# Altium PCB FM375_LQFP64_SOCKET.PcbDoc (part 1 of 3)
Units mil, origin at the board's own origin, x right, y up, seen from the top; angles counter-clockwise.
Board outline 6000 x 4000 mil, 2 copper layers (Top Layer, Bottom Layer); 12 components, 66 nets, 201 pads, 0 vias.
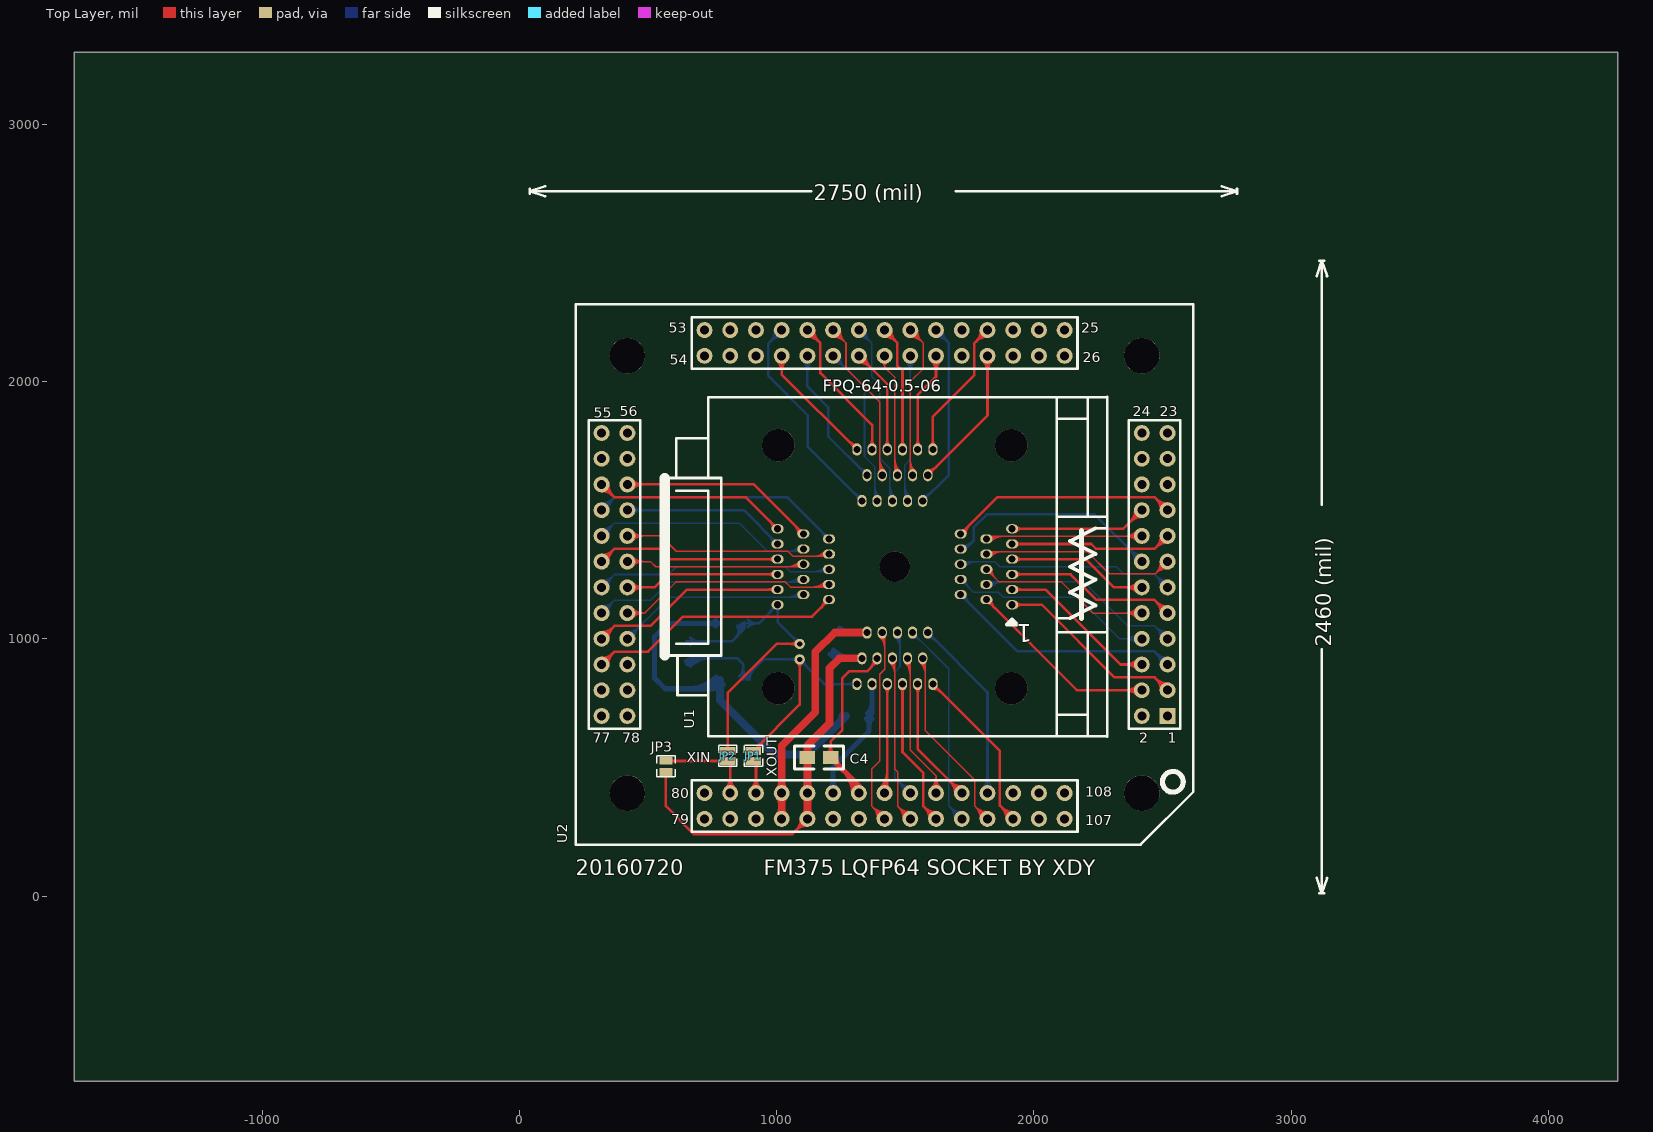
[diagram p0: Top Layer view]
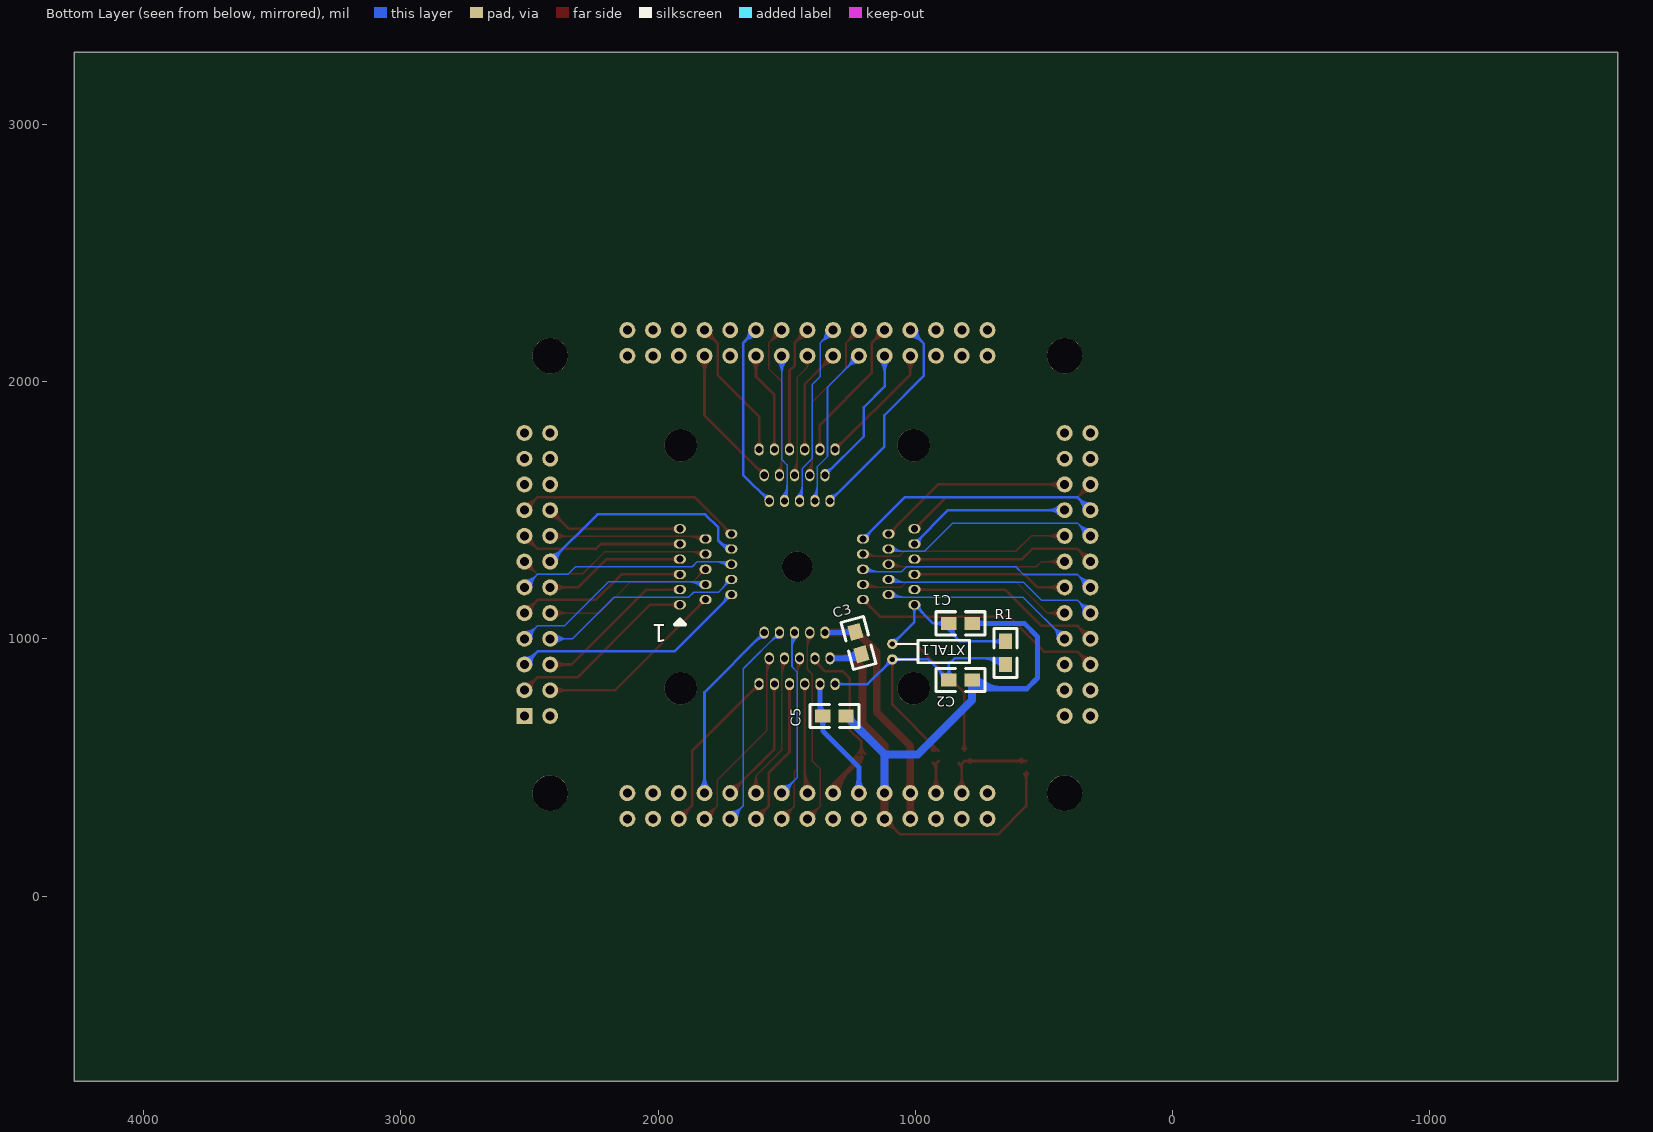
[diagram p1: Bottom Layer view, seen from below]

## Layer stack, top to bottom
Top Layer: signal copper 1.4
Dielectric: dielectric 12.6, FR-4, Dk 4.8
Bottom Layer: signal copper 1.4

## Board outline
-1730,-720 4270,-720 4270,3280 -1730,3280

## Design rules (kind name [scope] priority, off if disabled: settings)
Clearance [All] p1: gap=5
HoleSize [All] p1: absolutevalues=TRUE maxlimit=500 minlimit=1 maxpercent=80.000 minpercent=20.000
HoleToHoleClearance [All] p1: gap=5 allowstackedmicrovias=TRUE
MinimumSolderMaskSliver [All] p1: minsoldermaskwidth=0
PolygonConnect [All] p1: connectstyle=Relief reliefconductorwidth=10 reliefentries=4 polygonreliefangle="90 Angle"
RoutingVias [All] p1: holewidth=28 width=50 viastyle="Through Hole" minholewidth=28 minwidth=50 maxholewidth=28 maxwidth=50
SilkToSilkClearance [All] p1: silktosilkclearance=0
SilkscreenOverComponentPads [All] p1: minsilkscreentomaskgap=0
SolderMaskExpansion [All] p1: expansion=4
TestPointUsage [All] p1: valid=0 allowmultiple=FALSE
Testpoint [All] p1: side=15 testpointundercomponent=TRUE minsize=40 maxsize=100 preferedsize=60 minholesize=0 maxholesize=40 preferedholesize=32 testpointgrid=1 style=1023 order=0123456789
Width [All] p1: maxlimit=100 minlimit=5 preferedwidth=10
19 further rules are at their usual default settings.

## Components (designator, comment, footprint, x,y, rotation, side; value= is the part's Value field where it differs from the comment)
C1 "Cap" 0805 870,1060 r180 bottom
C2 "Cap" 0805 870,840 r180 bottom
C3 "100nF" 0805 1210,940 r75 bottom
C4 "3.3nF" 0805 1120,539 r0 top
C5 "100nF" 0805 1270,700 r0 bottom
JP1 "XOUT" 0603_SHORT#1 910,580 r270 top
JP2 "XIN" 0603_SHORT#1 810,580 r270 top
JP3 "XIN" 0603_SHORT#2 570,540 r270 top
R1 "10M" 0805 650,900 r90 bottom
U1 "FM375" QFP64_10*10_JJ 1460,1280 r180 top
U2 "FM375_SOCKET108" SOCKET108_LARGE 2520,700 r180 top
XTAL1 "32K" XTAL-RB32K_2 1090,980 r270 bottom

## Footprints (in the part's own frame and the unit in brackets; to place one, negate y for a bottom-side part, rotate by r counter-clockwise, add the part's x,y. Pads: shape width x height; smd on the part's side, far side on the other; paste and mask are expansions set on the pad)
0603_SHORT#1 [mm]
  rect 0.8x1.524 smd: 1(0.4,0) 2(1.4,0)
  silkscreen extent -0.14,-0.9 1.94,0.9
0603_SHORT#2 [mm]
  rect 0.8x1.27 smd: 1(0.35,-0.01) 2(1.46,0)
  silkscreen extent -0.14,-0.9 1.94,0.9
0805 [mil]
  rect 60x50 smd: 1(0,0) 2(90,0)
  silkscreen extent -50,-45 140,45
QFP64_10*10_JJ [mm]
  round 3.2 hole 3.2: 0(-11.5,12) 0(-11.5,-12) 0(11.5,12) 0(11.5,-12)
  round 3 hole 3: 0(0,0)
  oval 1.2x0.9 hole 0.7: 1(-11.58,3.75) 2(-9.04,3.25) 3(-6.5,2.75) 4(-11.58,2.25) 5(-9.04,1.75) 6(-6.5,1.25) 7(-11.58,0.75) 8(-9.04,0.25) 9(-6.5,-0.25) 10(-11.58,-0.75) 11(-9.04,-1.25) 12(-6.5,-1.75) 13(-11.58,-2.25) 14(-9.04,-2.75) 15(-6.5,-3.25) 16(-11.58,-3.75) 33(11.58,-3.75) 34(9.04,-3.25) 35(6.5,-2.75) 36(11.58,-2.25) 37(9.04,-1.75) 38(6.5,-1.25) 39(11.58,-0.75) 40(9.04,-0.25) 41(6.5,0.25) 42(11.58,0.75) 43(9.04,1.25) 44(6.5,1.75) 45(11.58,2.25) 46(9.04,2.75) 47(6.5,3.25) 48(11.58,3.75)
  oval 0.9x1.2 hole 0.7: 17(-3.75,-11.58) 18(-3.25,-9.04) 19(-2.75,-6.5) 20(-2.25,-11.58) 21(-1.75,-9.04) 22(-1.25,-6.5) 23(-0.75,-11.58) 24(-0.25,-9.04) 25(0.25,-6.5) 26(0.75,-11.58) 27(1.25,-9.04) 28(1.75,-6.5) 29(2.25,-11.58) 30(2.75,-9.04) 31(3.25,-6.5) 32(3.75,-11.58) 49(3.75,11.58) 50(3.25,9.04) 51(2.75,6.5) 52(2.25,11.58) 53(1.75,9.04) 54(1.25,6.5) 55(0.75,11.58) 56(0.25,9.04) 57(-0.25,6.5) 58(-0.75,11.58) 59(-1.25,9.04) 60(-1.75,6.5) 61(-2.25,11.58) 62(-2.75,9.04) 63(-3.25,6.5) 64(-3.75,11.58)
  silkscreen extent -20.96,-16.76 22.73,16.76
SOCKET108_LARGE [mil]
  round 137.8 hole 137.8: 0(100,300) 0(100,-1400) 0(2100,-1400) 0(2100,300)
  rect 62x62 hole 35: 1(0,0)
  round 62 hole 35: 2(100,0) 3(0,-100) 4(100,-100) 5(0,-200) 6(100,-200) 7(0,-300) 8(100,-300) 9(0,-400) 10(100,-400) 11(0,-500) 12(100,-500) 13(0,-600) 14(100,-600) 15(0,-700) 16(100,-700) 17(0,-800) 18(100,-800) 19(0,-900) 20(100,-900) 21(0,-1000) 22(100,-1000) 23(0,-1100) 24(100,-1100) 25(400,-1500) 26(400,-1400) 27(500,-1500) 28(500,-1400) 29(600,-1500) 30(600,-1400) 31(700,-1500) 32(700,-1400) 33(800,-1500) 34(800,-1400) 35(900,-1500) 36(900,-1400) 37(1000,-1500) 38(1000,-1400) 39(1100,-1500) 40(1100,-1400) 41(1200,-1500) 42(1200,-1400) 43(1300,-1500) 44(1300,-1400) 45(1400,-1500) 46(1400,-1400) 47(1500,-1500) 48(1500,-1400) 49(1600,-1500) 50(1600,-1400) 51(1700,-1500) 52(1700,-1400) 53(1800,-1500) 54(1800,-1400) 55(2200,-1100) 56(2100,-1100) 57(2200,-1000) 58(2100,-1000) 59(2200,-900) 60(2100,-900) 61(2200,-800) 62(2100,-800) 63(2200,-700) 64(2100,-700) 65(2200,-600) 66(2100,-600) 67(2200,-500) 68(2100,-500) 69(2200,-400) 70(2100,-400) 71(2200,-300) 72(2100,-300) 73(2200,-200) 74(2100,-200) 75(2200,-100) 76(2100,-100) 77(2200,0) 78(2100,0) 79(1800,400) 80(1800,300) 81(1700,400) 82(1700,300) 83(1600,400) 84(1600,300) 85(1500,400) 86(1500,300) 87(1400,400) 88(1400,300) 89(1300,400) 90(1300,300) 91(1200,400) 92(1200,300) 93(1100,400) 94(1100,300) 95(1000,400) 96(1000,300) 97(900,400) 98(900,300) 99(800,400) 100(800,300) 101(700,400) 102(700,300) 103(600,400) 104(600,300) 105(500,400) 106(500,300) 107(400,400) 108(400,300)
  silkscreen extent -100,-1600 2300,500
XTAL-RB32K_2 [mil]
  round 40 hole 20: 1(0,0) 2(60,0)
  silkscreen extent -15,14 73,300

## Part data
C1 C2: "Capacitor"
C3 C4 C5: library part Cap, "Capacitor"
JP1 JP2 JP3: library part JUMPER, "Jumper"
R1: library part RES1
U1: library part LQFP64-JJ
XTAL1: library part CRYSTAL, "Crystal"

## Nets (pads, with @x,y where several pads share a name; then routed paths per layer and width w, separated by ;. In a path a pad name is that pad's centre, name@x,y a point inside that pad or via, vN(x,y) a via of type N, cw(c..) or ccw(c..) an arc to the next point about the centre after c; other vN are vias at no path point)
CPLL: C4.2 U1.53 U2.92 | length 2015.7
  Top Layer w10: C4.2@1210,539 1210,600 1256,646 1256,847 1282,873 1351,873 1391.1,913.1 U1.53@1391.1,924.09 ; C4.2@1195.86,553.14 ccw(c1161.72,587.28) 1210,587.28 ; C4.2@1195.86,553.14 ccw(c1161.72,587.28) 1210,587.28 ; C4.2@1195.86,553.14 ccw(c1161.72,587.28) 1210,587.28 ; C4.2@1195.86,553.14 ccw(c1161.72,587.28) 1210,587.28 ; 1210,587.28 ccw(c1258.28,587.28) C4.2@1224.14,553.14 ; 1210,587.28 ccw(c1258.28,587.28) C4.2@1224.14,553.14 ; 1210,587.28 ccw(c1258.28,587.28) C4.2@1224.14,553.14 ; 1210,587.28 ccw(c1258.28,587.28) C4.2@1224.14,553.14 ; 1365.8,887.8 ccw(c1335.41,918.19) U1.53@1378.39,918.19 ; 1365.8,887.8 ccw(c1335.41,918.19) U1.53@1378.39,918.19 ; 1365.8,887.8 ccw(c1335.41,918.19) U1.53@1378.39,918.19 ; 1365.8,887.8 ccw(c1335.41,918.19) U1.53@1378.39,918.19 ; 1378.08,900.08 cw(c1391.1,887.05) U1.53@1391.1,905.47 ; 1378.08,900.08 cw(c1391.1,887.05) U1.53@1391.1,905.47 ; 1378.08,900.08 cw(c1391.1,887.05) U1.53@1391.1,905.47 ; 1378.08,900.08 cw(c1391.1,887.05) U1.53@1391.1,905.47
  Top Layer w20: C4.2@1210,539 1320,429 U2.92@1320,400 ; C4.2@1215,524 cw(c1215,499.86) C4.2@1232.07,516.93 ; C4.2@1215,524 cw(c1215,499.86) C4.2@1232.07,516.93 ; C4.2@1215,524 cw(c1215,499.86) C4.2@1232.07,516.93 ; C4.2@1215,524 cw(c1215,499.86) C4.2@1232.07,516.93 ; C4.2@1230,539 ccw(c1278.28,539) 1244.14,504.86 ; C4.2@1230,539 ccw(c1278.28,539) 1244.14,504.86 ; C4.2@1230,539 ccw(c1278.28,539) 1244.14,504.86 ; C4.2@1230,539 ccw(c1278.28,539) 1244.14,504.86 ; 1263.64,485.36 cw(c1178.29,400) U2.92@1299,400 ; 1263.64,485.36 cw(c1178.29,400) U2.92@1299,400 ; 1263.64,485.36 cw(c1178.29,400) U2.92@1299,400 ; 1263.64,485.36 cw(c1178.29,400) U2.92@1299,400 ; 1297.79,451.21 cw(c1246.57,400) U2.92@1319,400 ; 1297.79,451.21 cw(c1246.57,400) U2.92@1319,400 ; 1297.79,451.21 cw(c1246.57,400) U2.92@1319,400 ; 1297.79,451.21 cw(c1246.57,400) U2.92@1319,400
GND: C1.2 C2.2 C3.1 C4.1 C5.1 JP3.2 U1.50 U2.87 U2.88 | length 6776.6
  Top Layer w10: JP3.2@570,482.52 570,350 680,240 1060,240 U2.87@1120,300 ; 570,456.57 cw(c595.95,456.57) 577.6,474.92 ccw(c595.95,456.57) 570,456.57 ; 570,456.57 ccw(c544.05,456.57) 562.4,474.92 cw(c544.05,456.57) 570,456.57 ; 1075.62,255.62 cw(c1120,211.23) 1120,274 ccw(c1120,211.23) 1075.62,255.62 ; 1075.62,255.62 ccw(c1031.23,300) 1094,300 cw(c1031.23,300) 1075.62,255.62 ; 1092.69,272.69 cw(c1120,245.37) 1120,284 ccw(c1120,245.37) 1092.69,272.69 ; 1092.69,272.69 ccw(c1065.37,300) 1104,300 cw(c1065.37,300) 1092.69,272.69
  Top Layer w30: U2.87@1120,300 U2.88@1120,400 C4.1@1120,539 1120,585 1206,671 1206,885 1245.09,924.09 U1.50@1332.05,924.09 ; U2.87@1108.69,311.31 ccw(c1081.37,338.63) 1120,338.63 ; U2.87@1108.69,311.31 ccw(c1081.37,338.63) 1120,338.63 ; U2.87@1108.69,311.31 ccw(c1081.37,338.63) 1120,338.63 ; U2.87@1108.69,311.31 ccw(c1081.37,338.63) 1120,338.63 ; U2.88@1108.69,388.69 cw(c1081.37,361.37) 1120,361.37 ; U2.88@1108.69,388.69 cw(c1081.37,361.37) 1120,361.37 ; U2.88@1108.69,388.69 cw(c1081.37,361.37) 1120,361.37 ; U2.88@1108.69,388.69 cw(c1081.37,361.37) 1120,361.37 ; U2.88@1108.69,411.31 ccw(c1081.37,438.63) 1120,438.63 ; U2.88@1108.69,411.31 ccw(c1081.37,438.63) 1120,438.63 ; U2.88@1108.69,411.31 ccw(c1081.37,438.63) 1120,438.63 ; U2.88@1108.69,411.31 ccw(c1081.37,438.63) 1120,438.63 ; 1120,338.63 ccw(c1158.63,338.63) U2.87@1131.31,311.31 ; 1120,338.63 ccw(c1158.63,338.63) U2.87@1131.31,311.31 ; 1120,338.63 ccw(c1158.63,338.63) U2.87@1131.31,311.31 ; 1120,338.63 ccw(c1158.63,338.63) U2.87@1131.31,311.31 ; 1120,361.37 cw(c1158.63,361.37) U2.88@1131.31,388.69 ; 1120,361.37 cw(c1158.63,361.37) U2.88@1131.31,388.69 ; 1120,361.37 cw(c1158.63,361.37) U2.88@1131.31,388.69 ; 1120,361.37 cw(c1158.63,361.37) U2.88@1131.31,388.69 ; 1120,438.63 ccw(c1158.63,438.63) U2.88@1131.31,411.31 ; 1120,438.63 ccw(c1158.63,438.63) U2.88@1131.31,411.31 ; 1120,438.63 ccw(c1158.63,438.63) U2.88@1131.31,411.31 ; 1120,438.63 ccw(c1158.63,438.63) U2.88@1131.31,411.31
  Bottom Layer w20: C2.2@780,840 746,806 567,806 525,848 525,1008 577,1060 C1.2@780,1060 ; C3.1@1210,940 1225.91,924.09 U1.50@1332.05,924.09 ; 656.7,806 ccw(c656.7,958.3) C2.2@764.39,850.61 ; 656.7,806 ccw(c656.7,958.3) C2.2@764.39,850.61 ; 656.7,806 ccw(c656.7,958.3) C2.2@764.39,850.61 ; 656.7,806 ccw(c656.7,958.3) C2.2@764.39,850.61 ; 704.99,806 ccw(c704.99,910.01) C2.2@778.54,836.46 ; 704.99,806 ccw(c704.99,910.01) C2.2@778.54,836.46 ; 704.99,806 ccw(c704.99,910.01) C2.2@778.54,836.46 ; 704.99,806 ccw(c704.99,910.01) C2.2@778.54,836.46 ; 738.79,1060 cw(c738.79,1023.79) C1.2@764.39,1049.39 ; 738.79,1060 ccw(c738.79,1096.21) C1.2@764.39,1070.61 ; 738.79,1060 cw(c738.79,1023.79) C1.2@764.39,1049.39 ; 738.79,1060 ccw(c738.79,1096.21) C1.2@764.39,1070.61 ; 738.79,1060 ccw(c738.79,1096.21) C1.2@764.39,1070.61 ; 738.79,1060 cw(c738.79,1023.79) C1.2@764.39,1049.39 ; 738.79,1060 ccw(c738.79,1096.21) C1.2@764.39,1070.61 ; 738.79,1060 cw(c738.79,1023.79) C1.2@764.39,1049.39 ; 748.5,808.5 ccw(c720.48,836.53) C2.2@760.03,839.05 ; 748.5,808.5 ccw(c720.48,836.53) C2.2@760.03,839.05 ; 748.5,808.5 ccw(c720.48,836.53) C2.2@760.03,839.05 ; 748.5,808.5 ccw(c720.48,836.53) C2.2@760.03,839.05 ; 753.27,806 ccw(c753.27,861.73) C2.2@792.68,822.32 ; 753.27,806 ccw(c753.27,861.73) C2.2@792.68,822.32 ; 753.27,806 ccw(c753.27,861.73) C2.2@792.68,822.32 ; 753.27,806 ccw(c753.27,861.73) C2.2@792.68,822.32 ; C2.2@757.93,817.93 cw(c775,800.86) C2.2@775,825 ; C2.2@757.93,817.93 cw(c775,800.86) C2.2@775,825 ; C2.2@757.93,817.93 cw(c775,800.86) C2.2@775,825 ; C2.2@757.93,817.93 cw(c775,800.86) C2.2@775,825 ; C3.1@1207.76,941.29 ccw(c1249.28,982.82) 1249.28,924.09 ; C3.1@1207.76,941.29 ccw(c1249.28,982.82) 1249.28,924.09 ; C3.1@1207.76,941.29 ccw(c1249.28,982.82) 1249.28,924.09 ; C3.1@1207.76,941.29 ccw(c1249.28,982.82) 1249.28,924.09 ; C3.1@1221.9,955.44 ccw(c1297.57,1031.1) 1297.57,924.09 ; C3.1@1221.9,955.44 ccw(c1297.57,1031.1) 1297.57,924.09 ; C3.1@1221.9,955.44 ccw(c1297.57,1031.1) 1297.57,924.09 ; C3.1@1221.9,955.44 ccw(c1297.57,1031.1) 1297.57,924.09 ; 1313.42,924.09 cw(c1313.42,905.47) U1.50@1326.59,918.64 ; 1313.42,924.09 ccw(c1313.42,942.72) U1.50@1326.59,929.55 ; 1313.42,924.09 cw(c1313.42,905.47) U1.50@1326.59,918.64 ; 1313.42,924.09 ccw(c1313.42,942.72) U1.50@1326.59,929.55 ; 1313.42,924.09 ccw(c1313.42,942.72) U1.50@1326.59,929.55 ; 1313.42,924.09 cw(c1313.42,905.47) U1.50@1326.59,918.64 ; 1313.42,924.09 ccw(c1313.42,942.72) U1.50@1326.59,929.55 ; 1313.42,924.09 cw(c1313.42,905.47) U1.50@1326.59,918.64
  Bottom Layer w30: C2.2@780,840 780,761 991,550 1120,550 ; U2.88@1120,400 1120,421 1120,550 ; C5.1@1270,700 1120,550 ; U2.88@1108.69,411.31 ccw(c1081.37,438.63) 1120,438.63 ; U2.88@1108.69,411.31 ccw(c1081.37,438.63) 1120,438.63 ; U2.88@1108.69,411.31 ccw(c1081.37,438.63) 1120,438.63 ; U2.88@1108.69,411.31 ccw(c1081.37,438.63) 1120,438.63 ; 1120,438.63 ccw(c1158.63,438.63) U2.88@1131.31,411.31 ; 1120,438.63 ccw(c1158.63,438.63) U2.88@1131.31,411.31 ; 1120,438.63 ccw(c1158.63,438.63) U2.88@1131.31,411.31 ; 1120,438.63 ccw(c1158.63,438.63) U2.88@1131.31,411.31 ; 1244.39,674.39 ccw(c1218.79,700) C5.1@1255,700 ; 1244.39,674.39 ccw(c1218.79,700) C5.1@1255,700 ; 1244.39,674.39 ccw(c1218.79,700) C5.1@1255,700 ; 1244.39,674.39 ccw(c1218.79,700) C5.1@1255,700
PA0: U1.1 U2.3 | length 1571.8
  Top Layer w10: U1.1@1915.91,1132.36 2031.64,1132.36 2314,850 2470,850 U2.3@2520,800 ; U1.1@1930.8,1123.37 cw(c1952.51,1101.66) 1952.51,1132.36 ; U1.1@1930.8,1123.37 cw(c1952.51,1101.66) 1952.51,1132.36 ; U1.1@1930.8,1123.37 cw(c1952.51,1101.66) 1952.51,1132.36 ; U1.1@1930.8,1123.37 cw(c1952.51,1101.66) 1952.51,1132.36 ; U1.1@1930.8,1141.35 ccw(c1952.51,1163.06) 1952.51,1132.36 ; U1.1@1930.8,1141.35 ccw(c1952.51,1163.06) 1952.51,1132.36 ; U1.1@1930.8,1141.35 ccw(c1952.51,1163.06) 1952.51,1132.36 ; U1.1@1930.8,1141.35 ccw(c1952.51,1163.06) 1952.51,1132.36 ; 2475.62,844.38 cw(c2431.23,800) U2.3@2494,800 ; 2475.62,844.38 ccw(c2520,888.77) U2.3@2520,826 ; 2475.62,844.38 cw(c2431.23,800) U2.3@2494,800 ; 2475.62,844.38 ccw(c2520,888.77) U2.3@2520,826 ; 2475.62,844.38 ccw(c2520,888.77) U2.3@2520,826 ; 2475.62,844.38 cw(c2431.23,800) U2.3@2494,800 ; 2475.62,844.38 ccw(c2520,888.77) U2.3@2520,826 ; 2475.62,844.38 cw(c2431.23,800) U2.3@2494,800 ; 2492.69,827.31 cw(c2465.37,800) U2.3@2504,800 ; 2492.69,827.31 ccw(c2520,854.63) U2.3@2520,816 ; 2492.69,827.31 cw(c2465.37,800) U2.3@2504,800 ; 2492.69,827.31 ccw(c2520,854.63) U2.3@2520,816 ; 2492.69,827.31 ccw(c2520,854.63) U2.3@2520,816 ; 2492.69,827.31 cw(c2465.37,800) U2.3@2504,800 ; 2492.69,827.31 ccw(c2520,854.63) U2.3@2520,816 ; 2492.69,827.31 cw(c2465.37,800) U2.3@2504,800
PA1: U1.2 U2.4 | length 1579.9
  Top Layer w10: U1.2@1815.91,1152.05 2167.95,800 U2.4@2420,800 ; U1.2@1821.81,1139.33 cw(c1821.81,1122.89) 1833.44,1134.51 ; U1.2@1821.81,1139.33 cw(c1821.81,1122.89) 1833.44,1134.51 ; U1.2@1821.81,1139.33 cw(c1821.81,1122.89) 1833.44,1134.51 ; U1.2@1821.81,1139.33 cw(c1821.81,1122.89) 1833.44,1134.51 ; U1.2@1834.53,1152.05 ccw(c1879.48,1152.05) 1847.7,1120.26 ; U1.2@1834.53,1152.05 ccw(c1879.48,1152.05) 1847.7,1120.26 ; U1.2@1834.53,1152.05 ccw(c1879.48,1152.05) 1847.7,1120.26 ; U1.2@1834.53,1152.05 ccw(c1879.48,1152.05) 1847.7,1120.26 ; 2357.23,800 cw(c2357.23,737.23) U2.4@2401.62,781.62 ; 2357.23,800 ccw(c2357.23,862.77) U2.4@2401.62,818.38 ; 2357.23,800 cw(c2357.23,737.23) U2.4@2401.62,781.62 ; 2357.23,800 ccw(c2357.23,862.77) U2.4@2401.62,818.38 ; 2357.23,800 ccw(c2357.23,862.77) U2.4@2401.62,818.38 ; 2357.23,800 cw(c2357.23,737.23) U2.4@2401.62,781.62 ; 2357.23,800 ccw(c2357.23,862.77) U2.4@2401.62,818.38 ; 2357.23,800 cw(c2357.23,737.23) U2.4@2401.62,781.62 ; 2381.37,800 cw(c2381.37,761.37) U2.4@2408.69,788.69 ; 2381.37,800 ccw(c2381.37,838.63) U2.4@2408.69,811.31 ; 2381.37,800 cw(c2381.37,761.37) U2.4@2408.69,788.69 ; 2381.37,800 ccw(c2381.37,838.63) U2.4@2408.69,811.31 ; 2381.37,800 ccw(c2381.37,838.63) U2.4@2408.69,811.31 ; 2381.37,800 cw(c2381.37,761.37) U2.4@2408.69,788.69 ; 2381.37,800 ccw(c2381.37,838.63) U2.4@2408.69,811.31 ; 2381.37,800 cw(c2381.37,761.37) U2.4@2408.69,788.69
PA2: U1.3 U2.5 | length 1746.6
  Bottom Layer w10: U1.3@1715.91,1171.73 1936.64,951 2469,951 U2.5@2520,900 ; U1.3@1721.81,1159.02 cw(c1721.81,1142.57) 1733.44,1154.2 ; U1.3@1721.81,1159.02 cw(c1721.81,1142.57) 1733.44,1154.2 ; U1.3@1721.81,1159.02 cw(c1721.81,1142.57) 1733.44,1154.2 ; U1.3@1721.81,1159.02 cw(c1721.81,1142.57) 1733.44,1154.2 ; U1.3@1734.53,1171.73 ccw(c1779.48,1171.73) 1747.7,1139.94 ; U1.3@1734.53,1171.73 ccw(c1779.48,1171.73) 1747.7,1139.94 ; U1.3@1734.53,1171.73 ccw(c1779.48,1171.73) 1747.7,1139.94 ; U1.3@1734.53,1171.73 ccw(c1779.48,1171.73) 1747.7,1139.94 ; 2475.62,944.38 cw(c2431.23,900) U2.5@2494,900 ; 2475.62,944.38 ccw(c2520,988.77) U2.5@2520,926 ; 2475.62,944.38 cw(c2431.23,900) U2.5@2494,900 ; 2475.62,944.38 ccw(c2520,988.77) U2.5@2520,926 ; 2475.62,944.38 ccw(c2520,988.77) U2.5@2520,926 ; 2475.62,944.38 cw(c2431.23,900) U2.5@2494,900 ; 2475.62,944.38 ccw(c2520,988.77) U2.5@2520,926 ; 2475.62,944.38 cw(c2431.23,900) U2.5@2494,900 ; 2492.69,927.31 cw(c2465.37,900) U2.5@2504,900 ; 2492.69,927.31 ccw(c2520,954.63) U2.5@2520,916 ; 2492.69,927.31 cw(c2465.37,900) U2.5@2504,900 ; 2492.69,927.31 ccw(c2520,954.63) U2.5@2520,916 ; 2492.69,927.31 ccw(c2520,954.63) U2.5@2520,916 ; 2492.69,927.31 cw(c2465.37,900) U2.5@2504,900 ; 2492.69,927.31 ccw(c2520,954.63) U2.5@2520,916 ; 2492.69,927.31 cw(c2465.37,900) U2.5@2504,900
PA3: U1.4 U2.6 | length 1454.8
  Top Layer w10: U1.4@1915.91,1191.42 2045.58,1191.42 2337,900 U2.6@2420,900 ; U1.4@1930.8,1182.43 cw(c1952.51,1160.72) 1952.51,1191.42 ; U1.4@1930.8,1182.43 cw(c1952.51,1160.72) 1952.51,1191.42 ; U1.4@1930.8,1182.43 cw(c1952.51,1160.72) 1952.51,1191.42 ; U1.4@1930.8,1182.43 cw(c1952.51,1160.72) 1952.51,1191.42 ; U1.4@1930.8,1200.41 ccw(c1952.51,1222.12) 1952.51,1191.42 ; U1.4@1930.8,1200.41 ccw(c1952.51,1222.12) 1952.51,1191.42 ; U1.4@1930.8,1200.41 ccw(c1952.51,1222.12) 1952.51,1191.42 ; U1.4@1930.8,1200.41 ccw(c1952.51,1222.12) 1952.51,1191.42 ; 2357.23,900 cw(c2357.23,837.23) U2.6@2401.62,881.62 ; 2357.23,900 ccw(c2357.23,962.77) U2.6@2401.62,918.38 ; 2357.23,900 cw(c2357.23,837.23) U2.6@2401.62,881.62 ; 2357.23,900 ccw(c2357.23,962.77) U2.6@2401.62,918.38 ; 2357.23,900 ccw(c2357.23,962.77) U2.6@2401.62,918.38 ; 2357.23,900 cw(c2357.23,837.23) U2.6@2401.62,881.62 ; 2357.23,900 ccw(c2357.23,962.77) U2.6@2401.62,918.38 ; 2357.23,900 cw(c2357.23,837.23) U2.6@2401.62,881.62 ; 2381.37,900 cw(c2381.37,861.37) U2.6@2408.69,888.69 ; 2381.37,900 ccw(c2381.37,938.63) U2.6@2408.69,911.31 ; 2381.37,900 cw(c2381.37,861.37) U2.6@2408.69,888.69 ; 2381.37,900 ccw(c2381.37,938.63) U2.6@2408.69,911.31 ; 2381.37,900 ccw(c2381.37,938.63) U2.6@2408.69,911.31 ; 2381.37,900 cw(c2381.37,861.37) U2.6@2408.69,888.69 ; 2381.37,900 ccw(c2381.37,938.63) U2.6@2408.69,911.31 ; 2381.37,900 cw(c2381.37,861.37) U2.6@2408.69,888.69
PA4: U1.5 U2.7 | length 2399
  Bottom Layer w6: U1.5@1815.91,1211.1 1825.8,1221 2194,1221 2365,1050 2470,1050 U2.7@2520,1000 ; U1.5@1819.49,1213.42 cw(c1837.78,1195.13) 1837.78,1221 ; U1.5@1819.49,1213.42 cw(c1837.78,1195.13) 1837.78,1221 ; U1.5@1819.49,1213.42 cw(c1837.78,1195.13) 1837.78,1221 ; U1.5@1819.49,1213.42 cw(c1837.78,1195.13) 1837.78,1221 ; U1.5@1823.73,1209.18 cw(c1852.26,1180.65) 1852.26,1221 ; U1.5@1823.73,1209.18 cw(c1852.26,1180.65) 1852.26,1221 ; U1.5@1823.73,1209.18 cw(c1852.26,1180.65) 1852.26,1221 ; U1.5@1823.73,1209.18 cw(c1852.26,1180.65) 1852.26,1221 ; U1.5@1827.97,1204.94 cw(c1866.75,1166.16) 1866.75,1221 ; U1.5@1827.97,1204.94 cw(c1866.75,1166.16) 1866.75,1221 ; U1.5@1827.97,1204.94 cw(c1866.75,1166.16) 1866.75,1221 ; U1.5@1827.97,1204.94 cw(c1866.75,1166.16) 1866.75,1221 ; U1.5@1832.22,1200.7 cw(c1881.23,1151.68) 1881.23,1221 ; U1.5@1832.22,1200.7 cw(c1881.23,1151.68) 1881.23,1221 ; U1.5@1832.22,1200.7 cw(c1881.23,1151.68) 1881.23,1221 ; U1.5@1832.22,1200.7 cw(c1881.23,1151.68) 1881.23,1221 ; 2472.2,1047.8 cw(c2424.4,1000) U2.7@2492,1000 ; 2472.2,1047.8 ccw(c2520,1095.6) U2.7@2520,1028 ; 2472.2,1047.8 cw(c2424.4,1000) U2.7@2492,1000 ; 2472.2,1047.8 ccw(c2520,1095.6) U2.7@2520,1028 ; 2472.2,1047.8 ccw(c2520,1095.6) U2.7@2520,1028 ; 2472.2,1047.8 cw(c2424.4,1000) U2.7@2492,1000 ; 2472.2,1047.8 ccw(c2520,1095.6) U2.7@2520,1028 ; 2472.2,1047.8 cw(c2424.4,1000) U2.7@2492,1000 ; 2482.44,1037.56 cw(c2444.89,1000) U2.7@2498,1000 ; 2482.44,1037.56 ccw(c2520,1075.11) U2.7@2520,1022 ; 2482.44,1037.56 cw(c2444.89,1000) U2.7@2498,1000 ; 2482.44,1037.56 ccw(c2520,1075.11) U2.7@2520,1022 ; 2482.44,1037.56 ccw(c2520,1075.11) U2.7@2520,1022 ; 2482.44,1037.56 cw(c2444.89,1000) U2.7@2498,1000 ; 2482.44,1037.56 ccw(c2520,1075.11) U2.7@2520,1022 ; 2482.44,1037.56 cw(c2444.89,1000) U2.7@2498,1000 ; 2492.69,1027.31 cw(c2465.37,1000) U2.7@2504,1000 ; 2492.69,1027.31 ccw(c2520,1054.63) U2.7@2520,1016 ; 2492.69,1027.31 cw(c2465.37,1000) U2.7@2504,1000 ; 2492.69,1027.31 ccw(c2520,1054.63) U2.7@2520,1016 ; 2492.69,1027.31 ccw(c2520,1054.63) U2.7@2520,1016 ; 2492.69,1027.31 cw(c2465.37,1000) U2.7@2504,1000 ; 2492.69,1027.31 ccw(c2520,1054.63) U2.7@2520,1016 ; 2492.69,1027.31 cw(c2465.37,1000) U2.7@2504,1000
PA5: U1.6 U2.8 | length 2135
  Bottom Layer w6: U1.6@1715.91,1230.79 1765.69,1181 1862,1181 1881,1162 2171,1162 2333,1000 U2.8@2420,1000 ; U1.6@1721.81,1216.07 cw(c1721.81,1194.8) 1736.85,1209.84 ; U1.6@1721.81,1216.07 cw(c1721.81,1194.8) 1736.85,1209.84 ; U1.6@1721.81,1216.07 cw(c1721.81,1194.8) 1736.85,1209.84 ; U1.6@1721.81,1216.07 cw(c1721.81,1194.8) 1736.85,1209.84 ; U1.6@1730.53,1230.79 ccw(c1765.83,1230.79) 1740.87,1205.83 ; U1.6@1730.53,1230.79 ccw(c1765.83,1230.79) 1740.87,1205.83 ; U1.6@1730.53,1230.79 ccw(c1765.83,1230.79) 1740.87,1205.83 ; U1.6@1730.53,1230.79 ccw(c1765.83,1230.79) 1740.87,1205.83 ; U1.6@1736.53,1230.79 ccw(c1786.31,1230.79) 1751.11,1195.58 ; U1.6@1736.53,1230.79 ccw(c1786.31,1230.79) 1751.11,1195.58 ; U1.6@1736.53,1230.79 ccw(c1786.31,1230.79) 1751.11,1195.58 ; U1.6@1736.53,1230.79 ccw(c1786.31,1230.79) 1751.11,1195.58 ; 2352.4,1000 cw(c2352.4,932.4) U2.8@2400.2,980.2 ; 2352.4,1000 ccw(c2352.4,1067.6) U2.8@2400.2,1019.8 ; 2352.4,1000 cw(c2352.4,932.4) U2.8@2400.2,980.2 ; 2352.4,1000 ccw(c2352.4,1067.6) U2.8@2400.2,1019.8 ; 2352.4,1000 ccw(c2352.4,1067.6) U2.8@2400.2,1019.8 ; 2352.4,1000 cw(c2352.4,932.4) U2.8@2400.2,980.2 ; 2352.4,1000 ccw(c2352.4,1067.6) U2.8@2400.2,1019.8 ; 2352.4,1000 cw(c2352.4,932.4) U2.8@2400.2,980.2 ; 2366.89,1000 cw(c2366.89,946.89) U2.8@2404.44,984.44 ; 2366.89,1000 ccw(c2366.89,1053.11) U2.8@2404.44,1015.56 ; 2366.89,1000 cw(c2366.89,946.89) U2.8@2404.44,984.44 ; 2366.89,1000 ccw(c2366.89,1053.11) U2.8@2404.44,1015.56 ; 2366.89,1000 ccw(c2366.89,1053.11) U2.8@2404.44,1015.56 ; 2366.89,1000 cw(c2366.89,946.89) U2.8@2404.44,984.44 ; 2366.89,1000 ccw(c2366.89,1053.11) U2.8@2404.44,1015.56 ; 2366.89,1000 cw(c2366.89,946.89) U2.8@2404.44,984.44 ; 2381.37,1000 cw(c2381.37,961.37) U2.8@2408.69,988.69 ; 2381.37,1000 ccw(c2381.37,1038.63) U2.8@2408.69,1011.31 ; 2381.37,1000 cw(c2381.37,961.37) U2.8@2408.69,988.69 ; 2381.37,1000 ccw(c2381.37,1038.63) U2.8@2408.69,1011.31 ; 2381.37,1000 ccw(c2381.37,1038.63) U2.8@2408.69,1011.31 ; 2381.37,1000 cw(c2381.37,961.37) U2.8@2408.69,988.69 ; 2381.37,1000 ccw(c2381.37,1038.63) U2.8@2408.69,1011.31 ; 2381.37,1000 cw(c2381.37,961.37) U2.8@2408.69,988.69
PA6: U1.7 U2.9 | length 1496.4
  Top Layer w10: U1.7@1915.91,1250.47 2143.53,1250.47 2243,1151 2469,1151 U2.9@2520,1100 ; U1.7@1930.8,1241.48 cw(c1952.51,1219.77) 1952.51,1250.47 ; U1.7@1930.8,1241.48 cw(c1952.51,1219.77) 1952.51,1250.47 ; U1.7@1930.8,1241.48 cw(c1952.51,1219.77) 1952.51,1250.47 ; U1.7@1930.8,1241.48 cw(c1952.51,1219.77) 1952.51,1250.47 ; U1.7@1930.8,1259.46 ccw(c1952.51,1281.17) 1952.51,1250.47 ; U1.7@1930.8,1259.46 ccw(c1952.51,1281.17) 1952.51,1250.47 ; U1.7@1930.8,1259.46 ccw(c1952.51,1281.17) 1952.51,1250.47 ; U1.7@1930.8,1259.46 ccw(c1952.51,1281.17) 1952.51,1250.47 ; 2475.62,1144.38 cw(c2431.23,1100) U2.9@2494,1100 ; 2475.62,1144.38 ccw(c2520,1188.77) U2.9@2520,1126 ; 2475.62,1144.38 cw(c2431.23,1100) U2.9@2494,1100 ; 2475.62,1144.38 ccw(c2520,1188.77) U2.9@2520,1126 ; 2475.62,1144.38 ccw(c2520,1188.77) U2.9@2520,1126 ; 2475.62,1144.38 cw(c2431.23,1100) U2.9@2494,1100 ; 2475.62,1144.38 ccw(c2520,1188.77) U2.9@2520,1126 ; 2475.62,1144.38 cw(c2431.23,1100) U2.9@2494,1100 ; 2492.69,1127.31 cw(c2465.37,1100) U2.9@2504,1100 ; 2492.69,1127.31 ccw(c2520,1154.63) U2.9@2520,1116 ; 2492.69,1127.31 cw(c2465.37,1100) U2.9@2504,1100 ; 2492.69,1127.31 ccw(c2520,1154.63) U2.9@2520,1116 ; 2492.69,1127.31 ccw(c2520,1154.63) U2.9@2520,1116 ; 2492.69,1127.31 cw(c2465.37,1100) U2.9@2504,1100 ; 2492.69,1127.31 ccw(c2520,1154.63) U2.9@2520,1116 ; 2492.69,1127.31 cw(c2465.37,1100) U2.9@2504,1100
PA7: U1.8 U2.10 | length 2009.9
  Top Layer w6: U1.8@1815.91,1270.16 1865.06,1221 2108,1221 2229,1100 U2.10@2420,1100 ; U1.8@1821.81,1255.44 cw(c1821.81,1234.17) 1836.85,1249.21 ; U1.8@1821.81,1255.44 cw(c1821.81,1234.17) 1836.85,1249.21 ; U1.8@1821.81,1255.44 cw(c1821.81,1234.17) 1836.85,1249.21 ; U1.8@1821.81,1255.44 cw(c1821.81,1234.17) 1836.85,1249.21 ; U1.8@1830.53,1270.16 ccw(c1865.83,1270.16) 1840.87,1245.2 ; U1.8@1830.53,1270.16 ccw(c1865.83,1270.16) 1840.87,1245.2 ; U1.8@1830.53,1270.16 ccw(c1865.83,1270.16) 1840.87,1245.2 ; U1.8@1830.53,1270.16 ccw(c1865.83,1270.16) 1840.87,1245.2 ; U1.8@1836.53,1270.16 ccw(c1886.31,1270.16) 1851.11,1234.95 ; U1.8@1836.53,1270.16 ccw(c1886.31,1270.16) 1851.11,1234.95 ; U1.8@1836.53,1270.16 ccw(c1886.31,1270.16) 1851.11,1234.95 ; U1.8@1836.53,1270.16 ccw(c1886.31,1270.16) 1851.11,1234.95 ; 2352.4,1100 cw(c2352.4,1032.4) U2.10@2400.2,1080.2 ; 2352.4,1100 ccw(c2352.4,1167.6) U2.10@2400.2,1119.8 ; 2352.4,1100 cw(c2352.4,1032.4) U2.10@2400.2,1080.2 ; 2352.4,1100 ccw(c2352.4,1167.6) U2.10@2400.2,1119.8 ; 2352.4,1100 ccw(c2352.4,1167.6) U2.10@2400.2,1119.8 ; 2352.4,1100 cw(c2352.4,1032.4) U2.10@2400.2,1080.2 ; 2352.4,1100 ccw(c2352.4,1167.6) U2.10@2400.2,1119.8 ; 2352.4,1100 cw(c2352.4,1032.4) U2.10@2400.2,1080.2 ; 2366.89,1100 cw(c2366.89,1046.89) U2.10@2404.44,1084.44 ; 2366.89,1100 ccw(c2366.89,1153.11) U2.10@2404.44,1115.56 ; 2366.89,1100 cw(c2366.89,1046.89) U2.10@2404.44,1084.44 ; 2366.89,1100 ccw(c2366.89,1153.11) U2.10@2404.44,1115.56 ; 2366.89,1100 ccw(c2366.89,1153.11) U2.10@2404.44,1115.56 ; 2366.89,1100 cw(c2366.89,1046.89) U2.10@2404.44,1084.44 ; 2366.89,1100 ccw(c2366.89,1153.11) U2.10@2404.44,1115.56 ; 2366.89,1100 cw(c2366.89,1046.89) U2.10@2404.44,1084.44 ; 2381.37,1100 cw(c2381.37,1061.37) U2.10@2408.69,1088.69 ; 2381.37,1100 ccw(c2381.37,1138.63) U2.10@2408.69,1111.31 ; 2381.37,1100 cw(c2381.37,1061.37) U2.10@2408.69,1088.69 ; 2381.37,1100 ccw(c2381.37,1138.63) U2.10@2408.69,1111.31 ; 2381.37,1100 ccw(c2381.37,1138.63) U2.10@2408.69,1111.31 ; 2381.37,1100 cw(c2381.37,1061.37) U2.10@2408.69,1088.69 ; 2381.37,1100 ccw(c2381.37,1138.63) U2.10@2408.69,1111.31 ; 2381.37,1100 cw(c2381.37,1061.37) U2.10@2408.69,1088.69
PB0: U1.9 U2.11 | length 2460.1
  Bottom Layer w6: U1.9@1715.91,1289.84 1726.06,1300 1848,1300 1868,1280 2322,1280 2351,1251 2469,1251 U2.11@2520,1200 ; U1.9@1719.49,1292.16 cw(c1738.41,1273.25) 1738.41,1300 ; U1.9@1719.49,1292.16 cw(c1738.41,1273.25) 1738.41,1300 ; U1.9@1719.49,1292.16 cw(c1738.41,1273.25) 1738.41,1300 ; U1.9@1719.49,1292.16 cw(c1738.41,1273.25) 1738.41,1300 ; U1.9@1723.73,1287.92 cw(c1752.89,1258.76) 1752.89,1300 ; U1.9@1723.73,1287.92 cw(c1752.89,1258.76) 1752.89,1300 ; U1.9@1723.73,1287.92 cw(c1752.89,1258.76) 1752.89,1300 ; U1.9@1723.73,1287.92 cw(c1752.89,1258.76) 1752.89,1300 ; U1.9@1727.97,1283.68 cw(c1767.38,1244.28) 1767.38,1300 ; U1.9@1727.97,1283.68 cw(c1767.38,1244.28) 1767.38,1300 ; U1.9@1727.97,1283.68 cw(c1767.38,1244.28) 1767.38,1300 ; U1.9@1727.97,1283.68 cw(c1767.38,1244.28) 1767.38,1300 ; U1.9@1732.22,1279.44 cw(c1781.86,1229.79) 1781.86,1300 ; U1.9@1732.22,1279.44 cw(c1781.86,1229.79) 1781.86,1300 ; U1.9@1732.22,1279.44 cw(c1781.86,1229.79) 1781.86,1300 ; U1.9@1732.22,1279.44 cw(c1781.86,1229.79) 1781.86,1300 ; 2472.2,1247.8 cw(c2424.4,1200) U2.11@2492,1200 ; 2472.2,1247.8 ccw(c2520,1295.6) U2.11@2520,1228 ; 2472.2,1247.8 cw(c2424.4,1200) U2.11@2492,1200 ; 2472.2,1247.8 ccw(c2520,1295.6) U2.11@2520,1228 ; 2472.2,1247.8 ccw(c2520,1295.6) U2.11@2520,1228 ; 2472.2,1247.8 cw(c2424.4,1200) U2.11@2492,1200 ; 2472.2,1247.8 ccw(c2520,1295.6) U2.11@2520,1228 ; 2472.2,1247.8 cw(c2424.4,1200) U2.11@2492,1200 ; 2482.44,1237.56 cw(c2444.89,1200) U2.11@2498,1200 ; 2482.44,1237.56 ccw(c2520,1275.11) U2.11@2520,1222 ; 2482.44,1237.56 cw(c2444.89,1200) U2.11@2498,1200 ; 2482.44,1237.56 ccw(c2520,1275.11) U2.11@2520,1222 ; 2482.44,1237.56 ccw(c2520,1275.11) U2.11@2520,1222 ; 2482.44,1237.56 cw(c2444.89,1200) U2.11@2498,1200 ; 2482.44,1237.56 ccw(c2520,1275.11) U2.11@2520,1222 ; 2482.44,1237.56 cw(c2444.89,1200) U2.11@2498,1200 ; 2492.69,1227.31 cw(c2465.37,1200) U2.11@2504,1200 ; 2492.69,1227.31 ccw(c2520,1254.63) U2.11@2520,1216 ; 2492.69,1227.31 cw(c2465.37,1200) U2.11@2504,1200 ; 2492.69,1227.31 ccw(c2520,1254.63) U2.11@2520,1216 ; 2492.69,1227.31 ccw(c2520,1254.63) U2.11@2520,1216 ; 2492.69,1227.31 cw(c2465.37,1200) U2.11@2504,1200 ; 2492.69,1227.31 ccw(c2520,1254.63) U2.11@2520,1216 ; 2492.69,1227.31 cw(c2465.37,1200) U2.11@2504,1200
PB1: U1.10 U2.12 | length 1379.5
  Top Layer w10: U1.10@1915.91,1309.53 2201.47,1309.53 2311,1200 U2.12@2420,1200 ; U1.10@1930.8,1300.54 cw(c1952.51,1278.83) 1952.51,1309.53 ; U1.10@1930.8,1300.54 cw(c1952.51,1278.83) 1952.51,1309.53 ; U1.10@1930.8,1300.54 cw(c1952.51,1278.83) 1952.51,1309.53 ; U1.10@1930.8,1300.54 cw(c1952.51,1278.83) 1952.51,1309.53 ; U1.10@1930.8,1318.52 ccw(c1952.51,1340.23) 1952.51,1309.53 ; U1.10@1930.8,1318.52 ccw(c1952.51,1340.23) 1952.51,1309.53 ; U1.10@1930.8,1318.52 ccw(c1952.51,1340.23) 1952.51,1309.53 ; U1.10@1930.8,1318.52 ccw(c1952.51,1340.23) 1952.51,1309.53 ; 2357.23,1200 cw(c2357.23,1137.23) U2.12@2401.62,1181.62 ; 2357.23,1200 ccw(c2357.23,1262.77) U2.12@2401.62,1218.38 ; 2357.23,1200 cw(c2357.23,1137.23) U2.12@2401.62,1181.62 ; 2357.23,1200 ccw(c2357.23,1262.77) U2.12@2401.62,1218.38 ; 2357.23,1200 ccw(c2357.23,1262.77) U2.12@2401.62,1218.38 ; 2357.23,1200 cw(c2357.23,1137.23) U2.12@2401.62,1181.62 ; 2357.23,1200 ccw(c2357.23,1262.77) U2.12@2401.62,1218.38 ; 2357.23,1200 cw(c2357.23,1137.23) U2.12@2401.62,1181.62 ; 2381.37,1200 cw(c2381.37,1161.37) U2.12@2408.69,1188.69 ; 2381.37,1200 ccw(c2381.37,1238.63) U2.12@2408.69,1211.31 ; 2381.37,1200 cw(c2381.37,1161.37) U2.12@2408.69,1188.69 ; 2381.37,1200 ccw(c2381.37,1238.63) U2.12@2408.69,1211.31 ; 2381.37,1200 ccw(c2381.37,1238.63) U2.12@2408.69,1211.31 ; 2381.37,1200 cw(c2381.37,1161.37) U2.12@2408.69,1188.69 ; 2381.37,1200 ccw(c2381.37,1238.63) U2.12@2408.69,1211.31 ; 2381.37,1200 cw(c2381.37,1161.37) U2.12@2408.69,1188.69
PB2: U1.11 U2.13 | length 2332.3
  Top Layer w6: U1.11@1815.91,1329.21 1825.69,1339 2207,1339 2293,1253 2473,1253 ; U2.13@2520,1300 2473,1253 ; U1.11@1819.49,1331.53 cw(c1837.51,1313.51) 1837.51,1339 ; U1.11@1819.49,1331.53 cw(c1837.51,1313.51) 1837.51,1339 ; U1.11@1819.49,1331.53 cw(c1837.51,1313.51) 1837.51,1339 ; U1.11@1819.49,1331.53 cw(c1837.51,1313.51) 1837.51,1339 ; U1.11@1823.73,1327.29 cw(c1852,1299.03) 1852,1339 ; U1.11@1823.73,1327.29 cw(c1852,1299.03) 1852,1339 ; U1.11@1823.73,1327.29 cw(c1852,1299.03) 1852,1339 ; U1.11@1823.73,1327.29 cw(c1852,1299.03) 1852,1339 ; U1.11@1827.97,1323.05 cw(c1866.48,1284.54) 1866.48,1339 ; U1.11@1827.97,1323.05 cw(c1866.48,1284.54) 1866.48,1339 ; U1.11@1827.97,1323.05 cw(c1866.48,1284.54) 1866.48,1339 ; U1.11@1827.97,1323.05 cw(c1866.48,1284.54) 1866.48,1339 ; U1.11@1832.22,1318.81 cw(c1880.97,1270.05) 1880.97,1339 ; U1.11@1832.22,1318.81 cw(c1880.97,1270.05) 1880.97,1339 ; U1.11@1832.22,1318.81 cw(c1880.97,1270.05) 1880.97,1339 ; U1.11@1832.22,1318.81 cw(c1880.97,1270.05) 1880.97,1339 ; 2473,1253 cw(c2518.88,1207.12) U2.13@2519.66,1272 ; 2473,1253 ccw(c2427.12,1298.88) U2.13@2492,1299.66 ; 2473,1253 cw(c2518.88,1207.12) U2.13@2519.66,1272 ; 2473,1253 ccw(c2427.12,1298.88) U2.13@2492,1299.66 ; 2473,1253 ccw(c2427.12,1298.88) U2.13@2492,1299.66 ; 2473,1253 cw(c2518.88,1207.12) U2.13@2519.66,1272 ; 2473,1253 ccw(c2427.12,1298.88) U2.13@2492,1299.66 ; 2473,1253 cw(c2518.88,1207.12) U2.13@2519.66,1272 ; 2483.07,1263.07 cw(c2519.12,1227.02) U2.13@2519.74,1278 ; 2483.07,1263.07 ccw(c2447.02,1299.12) U2.13@2498,1299.74 ; 2483.07,1263.07 cw(c2519.12,1227.02) U2.13@2519.74,1278 ; 2483.07,1263.07 ccw(c2447.02,1299.12) U2.13@2498,1299.74 ; 2483.07,1263.07 ccw(c2447.02,1299.12) U2.13@2498,1299.74 ; 2483.07,1263.07 cw(c2519.12,1227.02) U2.13@2519.74,1278 ; 2483.07,1263.07 ccw(c2447.02,1299.12) U2.13@2498,1299.74 ; 2483.07,1263.07 cw(c2519.12,1227.02) U2.13@2519.74,1278 ; 2493.14,1273.14 cw(c2519.36,1246.93) U2.13@2519.81,1284 ; 2493.14,1273.14 ccw(c2466.93,1299.36) U2.13@2504,1299.81 ; 2493.14,1273.14 cw(c2519.36,1246.93) U2.13@2519.81,1284 ; 2493.14,1273.14 ccw(c2466.93,1299.36) U2.13@2504,1299.81 ; 2493.14,1273.14 ccw(c2466.93,1299.36) U2.13@2504,1299.81 ; 2493.14,1273.14 cw(c2519.36,1246.93) U2.13@2519.81,1284 ; 2493.14,1273.14 ccw(c2466.93,1299.36) U2.13@2504,1299.81 ; 2493.14,1273.14 cw(c2519.36,1246.93) U2.13@2519.81,1284
PB3: U1.12 U2.14 | length 1803.6
  Bottom Layer w10: U1.12@1715.91,1348.9 1733.9,1348.9 1766,1381 1766,1432 1818,1484 2236,1484 U2.14@2420,1300 ; U1.12@1721.81,1351.61 ccw(c1721.81,1387.35) 1747.08,1362.08 ; U1.12@1721.81,1351.61 ccw(c1721.81,1387.35) 1747.08,1362.08 ; U1.12@1721.81,1351.61 ccw(c1721.81,1387.35) 1747.08,1362.08 ; U1.12@1721.81,1351.61 ccw(c1721.81,1387.35) 1747.08,1362.08 ; U1.12@1721.81,1361.61 ccw(c1721.81,1421.49) 1764.15,1379.15 ; U1.12@1721.81,1361.61 ccw(c1721.81,1421.49) 1764.15,1379.15 ; U1.12@1721.81,1361.61 ccw(c1721.81,1421.49) 1764.15,1379.15 ; U1.12@1721.81,1361.61 ccw(c1721.81,1421.49) 1764.15,1379.15 ; 2375.62,1344.38 cw(c2331.23,1300) U2.14@2394,1300 ; 2375.62,1344.38 ccw(c2420,1388.77) U2.14@2420,1326 ; 2375.62,1344.38 cw(c2331.23,1300) U2.14@2394,1300 ; 2375.62,1344.38 ccw(c2420,1388.77) U2.14@2420,1326 ; 2375.62,1344.38 ccw(c2420,1388.77) U2.14@2420,1326 ; 2375.62,1344.38 cw(c2331.23,1300) U2.14@2394,1300 ; 2375.62,1344.38 ccw(c2420,1388.77) U2.14@2420,1326 ; 2375.62,1344.38 cw(c2331.23,1300) U2.14@2394,1300 ; 2392.69,1327.31 cw(c2365.37,1300) U2.14@2404,1300 ; 2392.69,1327.31 ccw(c2420,1354.63) U2.14@2420,1316 ; 2392.69,1327.31 cw(c2365.37,1300) U2.14@2404,1300 ; 2392.69,1327.31 ccw(c2420,1354.63) U2.14@2420,1316 ; 2392.69,1327.31 ccw(c2420,1354.63) U2.14@2420,1316 ; 2392.69,1327.31 cw(c2365.37,1300) U2.14@2404,1300 ; 2392.69,1327.31 ccw(c2420,1354.63) U2.14@2420,1316 ; 2392.69,1327.31 cw(c2365.37,1300) U2.14@2404,1300
PB4: U1.13 U2.15 | length 1462.5
  Top Layer w10: U1.13@1915.91,1368.58 2223.42,1368.58 2242,1350 2470,1350 U2.15@2520,1400 ; U1.13@1930.8,1359.59 cw(c1952.51,1337.88) 1952.51,1368.58 ; U1.13@1930.8,1359.59 cw(c1952.51,1337.88) 1952.51,1368.58 ; U1.13@1930.8,1359.59 cw(c1952.51,1337.88) 1952.51,1368.58 ; U1.13@1930.8,1359.59 cw(c1952.51,1337.88) 1952.51,1368.58 ; U1.13@1930.8,1377.57 ccw(c1952.51,1399.28) 1952.51,1368.58 ; U1.13@1930.8,1377.57 ccw(c1952.51,1399.28) 1952.51,1368.58 ; U1.13@1930.8,1377.57 ccw(c1952.51,1399.28) 1952.51,1368.58 ; U1.13@1930.8,1377.57 ccw(c1952.51,1399.28) 1952.51,1368.58 ; 2475.62,1355.62 cw(c2520,1311.23) U2.15@2520,1374 ; 2475.62,1355.62 ccw(c2431.23,1400) U2.15@2494,1400 ; 2475.62,1355.62 cw(c2520,1311.23) U2.15@2520,1374 ; 2475.62,1355.62 ccw(c2431.23,1400) U2.15@2494,1400 ; 2475.62,1355.62 ccw(c2431.23,1400) U2.15@2494,1400 ; 2475.62,1355.62 cw(c2520,1311.23) U2.15@2520,1374 ; 2475.62,1355.62 ccw(c2431.23,1400) U2.15@2494,1400 ; 2475.62,1355.62 cw(c2520,1311.23) U2.15@2520,1374 ; 2492.69,1372.69 cw(c2520,1345.37) U2.15@2520,1384 ; 2492.69,1372.69 ccw(c2465.37,1400) U2.15@2504,1400 ; 2492.69,1372.69 cw(c2520,1345.37) U2.15@2520,1384 ; 2492.69,1372.69 ccw(c2465.37,1400) U2.15@2504,1400 ; 2492.69,1372.69 ccw(c2465.37,1400) U2.15@2504,1400 ; 2492.69,1372.69 cw(c2520,1345.37) U2.15@2520,1384 ; 2492.69,1372.69 ccw(c2465.37,1400) U2.15@2504,1400 ; 2492.69,1372.69 cw(c2520,1345.37) U2.15@2520,1384
PB5: U1.14 U2.16 | length 2201.1
  Top Layer w6: U1.14@1815.91,1388.27 1825.64,1398 2418,1398 U2.16@2420,1400 ; U1.14@1819.49,1390.59 cw(c1837.38,1372.7) 1837.38,1398 ; U1.14@1819.49,1390.59 cw(c1837.38,1372.7) 1837.38,1398 ; U1.14@1819.49,1390.59 cw(c1837.38,1372.7) 1837.38,1398 ; U1.14@1819.49,1390.59 cw(c1837.38,1372.7) 1837.38,1398 ; U1.14@1823.73,1386.35 cw(c1851.87,1358.21) 1851.87,1398 ; U1.14@1823.73,1386.35 cw(c1851.87,1358.21) 1851.87,1398 ; U1.14@1823.73,1386.35 cw(c1851.87,1358.21) 1851.87,1398 ; U1.14@1823.73,1386.35 cw(c1851.87,1358.21) 1851.87,1398 ; U1.14@1827.97,1382.1 cw(c1866.35,1343.73) 1866.35,1398 ; U1.14@1827.97,1382.1 cw(c1866.35,1343.73) 1866.35,1398 ; U1.14@1827.97,1382.1 cw(c1866.35,1343.73) 1866.35,1398 ; U1.14@1827.97,1382.1 cw(c1866.35,1343.73) 1866.35,1398 ; U1.14@1832.22,1377.86 cw(c1880.84,1329.24) 1880.84,1398 ; U1.14@1832.22,1377.86 cw(c1880.84,1329.24) 1880.84,1398 ; U1.14@1832.22,1377.86 cw(c1880.84,1329.24) 1880.84,1398 ; U1.14@1832.22,1377.86 cw(c1880.84,1329.24) 1880.84,1398 ; 2347.57,1398 ccw(c2347.57,1472.43) U2.16@2400.2,1419.8 ; 2347.57,1398 ccw(c2347.57,1472.43) U2.16@2400.2,1419.8 ; 2347.57,1398 ccw(c2347.57,1472.43) U2.16@2400.2,1419.8 ; 2347.57,1398 ccw(c2347.57,1472.43) U2.16@2400.2,1419.8 ; 2357.23,1398 cw(c2357.23,1337.23) U2.16@2400.2,1380.2 ; 2357.23,1398 cw(c2357.23,1337.23) U2.16@2400.2,1380.2 ; 2357.23,1398 cw(c2357.23,1337.23) U2.16@2400.2,1380.2 ; 2357.23,1398 cw(c2357.23,1337.23) U2.16@2400.2,1380.2 ; 2362.06,1398 ccw(c2362.06,1457.94) U2.16@2404.44,1415.56 ; 2362.06,1398 ccw(c2362.06,1457.94) U2.16@2404.44,1415.56 ; 2362.06,1398 ccw(c2362.06,1457.94) U2.16@2404.44,1415.56 ; 2362.06,1398 ccw(c2362.06,1457.94) U2.16@2404.44,1415.56 ; 2371.72,1398 cw(c2371.72,1351.72) U2.16@2404.44,1384.44 ; 2371.72,1398 cw(c2371.72,1351.72) U2.16@2404.44,1384.44 ; 2371.72,1398 cw(c2371.72,1351.72) U2.16@2404.44,1384.44 ; 2371.72,1398 cw(c2371.72,1351.72) U2.16@2404.44,1384.44 ; 2376.54,1398 ccw(c2376.54,1443.46) U2.16@2408.69,1411.31 ; 2376.54,1398 ccw(c2376.54,1443.46) U2.16@2408.69,1411.31 ; 2376.54,1398 ccw(c2376.54,1443.46) U2.16@2408.69,1411.31 ; 2376.54,1398 ccw(c2376.54,1443.46) U2.16@2408.69,1411.31 ; 2386.2,1398 cw(c2386.2,1366.2) U2.16@2408.69,1388.69 ; 2386.2,1398 cw(c2386.2,1366.2) U2.16@2408.69,1388.69 ; 2386.2,1398 cw(c2386.2,1366.2) U2.16@2408.69,1388.69 ; 2386.2,1398 cw(c2386.2,1366.2) U2.16@2408.69,1388.69
PB6: U1.15 U2.17 | length 1714.5
  Top Layer w10: U1.15@1715.91,1407.95 1858.95,1551 2469,1551 U2.17@2520,1500 ; U1.15@1721.81,1420.67 ccw(c1721.81,1437.11) 1733.44,1425.49 ; U1.15@1721.81,1420.67 ccw(c1721.81,1437.11) 1733.44,1425.49 ; U1.15@1721.81,1420.67 ccw(c1721.81,1437.11) 1733.44,1425.49 ; U1.15@1721.81,1420.67 ccw(c1721.81,1437.11) 1733.44,1425.49 ; U1.15@1734.53,1407.95 cw(c1779.48,1407.95) 1747.7,1439.74 ; U1.15@1734.53,1407.95 cw(c1779.48,1407.95) 1747.7,1439.74 ; U1.15@1734.53,1407.95 cw(c1779.48,1407.95) 1747.7,1439.74 ; U1.15@1734.53,1407.95 cw(c1779.48,1407.95) 1747.7,1439.74 ; 2475.62,1544.38 cw(c2431.23,1500) U2.17@2494,1500 ; 2475.62,1544.38 ccw(c2520,1588.77) U2.17@2520,1526 ; 2475.62,1544.38 cw(c2431.23,1500) U2.17@2494,1500 ; 2475.62,1544.38 ccw(c2520,1588.77) U2.17@2520,1526 ; 2475.62,1544.38 ccw(c2520,1588.77) U2.17@2520,1526 ; 2475.62,1544.38 cw(c2431.23,1500) U2.17@2494,1500 ; 2475.62,1544.38 ccw(c2520,1588.77) U2.17@2520,1526 ; 2475.62,1544.38 cw(c2431.23,1500) U2.17@2494,1500 ; 2492.69,1527.31 cw(c2465.37,1500) U2.17@2504,1500 ; 2492.69,1527.31 ccw(c2520,1554.63) U2.17@2520,1516 ; 2492.69,1527.31 cw(c2465.37,1500) U2.17@2504,1500 ; 2492.69,1527.31 ccw(c2520,1554.63) U2.17@2520,1516 ; 2492.69,1527.31 ccw(c2520,1554.63) U2.17@2520,1516 ; 2492.69,1527.31 cw(c2465.37,1500) U2.17@2504,1500 ; 2492.69,1527.31 ccw(c2520,1554.63) U2.17@2520,1516 ; 2492.69,1527.31 cw(c2465.37,1500) U2.17@2504,1500
PB7: U1.16 U2.18 | length 1364.1
  Top Layer w10: U1.16@1915.91,1427.64 2347.64,1427.64 U2.18@2420,1500 ; U1.16@1930.8,1418.65 cw(c1952.51,1396.94) 1952.51,1427.64 ; U1.16@1930.8,1418.65 cw(c1952.51,1396.94) 1952.51,1427.64 ; U1.16@1930.8,1418.65 cw(c1952.51,1396.94) 1952.51,1427.64 ; U1.16@1930.8,1418.65 cw(c1952.51,1396.94) 1952.51,1427.64 ; U1.16@1930.8,1436.63 ccw(c1952.51,1458.34) 1952.51,1427.64 ; U1.16@1930.8,1436.63 ccw(c1952.51,1458.34) 1952.51,1427.64 ; U1.16@1930.8,1436.63 ccw(c1952.51,1458.34) 1952.51,1427.64 ; U1.16@1930.8,1436.63 ccw(c1952.51,1458.34) 1952.51,1427.64 ; 2375.62,1455.62 cw(c2420,1411.23) U2.18@2420,1474 ; 2375.62,1455.62 ccw(c2331.23,1500) U2.18@2394,1500 ; 2375.62,1455.62 cw(c2420,1411.23) U2.18@2420,1474 ; 2375.62,1455.62 ccw(c2331.23,1500) U2.18@2394,1500 ; 2375.62,1455.62 ccw(c2331.23,1500) U2.18@2394,1500 ; 2375.62,1455.62 cw(c2420,1411.23) U2.18@2420,1474 ; 2375.62,1455.62 ccw(c2331.23,1500) U2.18@2394,1500 ; 2375.62,1455.62 cw(c2420,1411.23) U2.18@2420,1474 ; 2392.69,1472.69 cw(c2420,1445.37) U2.18@2420,1484 ; 2392.69,1472.69 ccw(c2365.37,1500) U2.18@2404,1500 ; 2392.69,1472.69 cw(c2420,1445.37) U2.18@2420,1484 ; 2392.69,1472.69 ccw(c2365.37,1500) U2.18@2404,1500 ; 2392.69,1472.69 ccw(c2365.37,1500) U2.18@2404,1500 ; 2392.69,1472.69 cw(c2420,1445.37) U2.18@2420,1484 ; 2392.69,1472.69 ccw(c2365.37,1500) U2.18@2404,1500 ; 2392.69,1472.69 cw(c2420,1445.37) U2.18@2420,1484
PC0: U1.17 U2.31 | length 1382
  Top Layer w10: U1.17@1607.64,1735.91 1607.64,1863.64 1769,2025 1769,2149 U2.31@1820,2200 ; U1.17@1598.65,1750.8 ccw(c1576.94,1772.51) 1607.64,1772.51 ; U1.17@1598.65,1750.8 ccw(c1576.94,1772.51) 1607.64,1772.51 ; U1.17@1598.65,1750.8 ccw(c1576.94,1772.51) 1607.64,1772.51 ; U1.17@1598.65,1750.8 ccw(c1576.94,1772.51) 1607.64,1772.51 ; 1607.64,1772.51 ccw(c1638.34,1772.51) U1.17@1616.63,1750.8 ; 1607.64,1772.51 ccw(c1638.34,1772.51) U1.17@1616.63,1750.8 ; 1607.64,1772.51 ccw(c1638.34,1772.51) U1.17@1616.63,1750.8 ; 1607.64,1772.51 ccw(c1638.34,1772.51) U1.17@1616.63,1750.8 ; 1775.62,2155.62 cw(c1820,2111.23) U2.31@1820,2174 ; 1775.62,2155.62 ccw(c1731.23,2200) U2.31@1794,2200 ; 1775.62,2155.62 cw(c1820,2111.23) U2.31@1820,2174 ; 1775.62,2155.62 ccw(c1731.23,2200) U2.31@1794,2200 ; 1775.62,2155.62 ccw(c1731.23,2200) U2.31@1794,2200 ; 1775.62,2155.62 cw(c1820,2111.23) U2.31@1820,2174 ; 1775.62,2155.62 ccw(c1731.23,2200) U2.31@1794,2200 ; 1775.62,2155.62 cw(c1820,2111.23) U2.31@1820,2174 ; 1792.69,2172.69 cw(c1820,2145.37) U2.31@1820,2184 ; 1792.69,2172.69 ccw(c1765.37,2200) U2.31@1804,2200 ; 1792.69,2172.69 cw(c1820,2145.37) U2.31@1820,2184 ; 1792.69,2172.69 ccw(c1765.37,2200) U2.31@1804,2200 ; 1792.69,2172.69 ccw(c1765.37,2200) U2.31@1804,2200 ; 1792.69,2172.69 cw(c1820,2145.37) U2.31@1820,2184 ; 1792.69,2172.69 ccw(c1765.37,2200) U2.31@1804,2200 ; 1792.69,2172.69 cw(c1820,2145.37) U2.31@1820,2184
PC1: U1.18 U2.32 | length 1390.2
  Top Layer w10: U1.18@1587.95,1635.91 1820,1867.95 U2.32@1820,2100 ; U1.18@1587.95,1654.53 ccw(c1587.95,1699.49) 1619.74,1667.7 ; U1.18@1587.95,1654.53 ccw(c1587.95,1699.49) 1619.74,1667.7 ; U1.18@1587.95,1654.53 ccw(c1587.95,1699.49) 1619.74,1667.7 ; U1.18@1587.95,1654.53 ccw(c1587.95,1699.49) 1619.74,1667.7 ; U1.18@1600.67,1641.81 cw(c1617.11,1641.81) 1605.49,1653.44 ; U1.18@1600.67,1641.81 cw(c1617.11,1641.81) 1605.49,1653.44 ; U1.18@1600.67,1641.81 cw(c1617.11,1641.81) 1605.49,1653.44 ; U1.18@1600.67,1641.81 cw(c1617.11,1641.81) 1605.49,1653.44 ; U2.32@1801.62,2081.62 cw(c1757.23,2037.23) 1820,2037.23 ; U2.32@1801.62,2081.62 cw(c1757.23,2037.23) 1820,2037.23 ; U2.32@1801.62,2081.62 cw(c1757.23,2037.23) 1820,2037.23 ; U2.32@1801.62,2081.62 cw(c1757.23,2037.23) 1820,2037.23 ; U2.32@1808.69,2088.69 cw(c1781.37,2061.37) 1820,2061.37 ; U2.32@1808.69,2088.69 cw(c1781.37,2061.37) 1820,2061.37 ; U2.32@1808.69,2088.69 cw(c1781.37,2061.37) 1820,2061.37 ; U2.32@1808.69,2088.69 cw(c1781.37,2061.37) 1820,2061.37 ; 1820,2037.23 cw(c1882.77,2037.23) U2.32@1838.38,2081.62 ; 1820,2037.23 cw(c1882.77,2037.23) U2.32@1838.38,2081.62 ; 1820,2037.23 cw(c1882.77,2037.23) U2.32@1838.38,2081.62 ; 1820,2037.23 cw(c1882.77,2037.23) U2.32@1838.38,2081.62 ; 1820,2061.37 cw(c1858.63,2061.37) U2.32@1831.31,2088.69 ; 1820,2061.37 cw(c1858.63,2061.37) U2.32@1831.31,2088.69 ; 1820,2061.37 cw(c1858.63,2061.37) U2.32@1831.31,2088.69 ; 1820,2061.37 cw(c1858.63,2061.37) U2.32@1831.31,2088.69